# Altium PCB Power Board.PcbDoc
Units mil, origin at the board's own origin, x right, y up, seen from the top; angles counter-clockwise.
Board outline 6010 x 5000 mil, 4 copper layers (Top Layer, Power Plane, Ground Plane, Bottom Layer); 59 components, 37 nets, 179 pads, 26 vias.
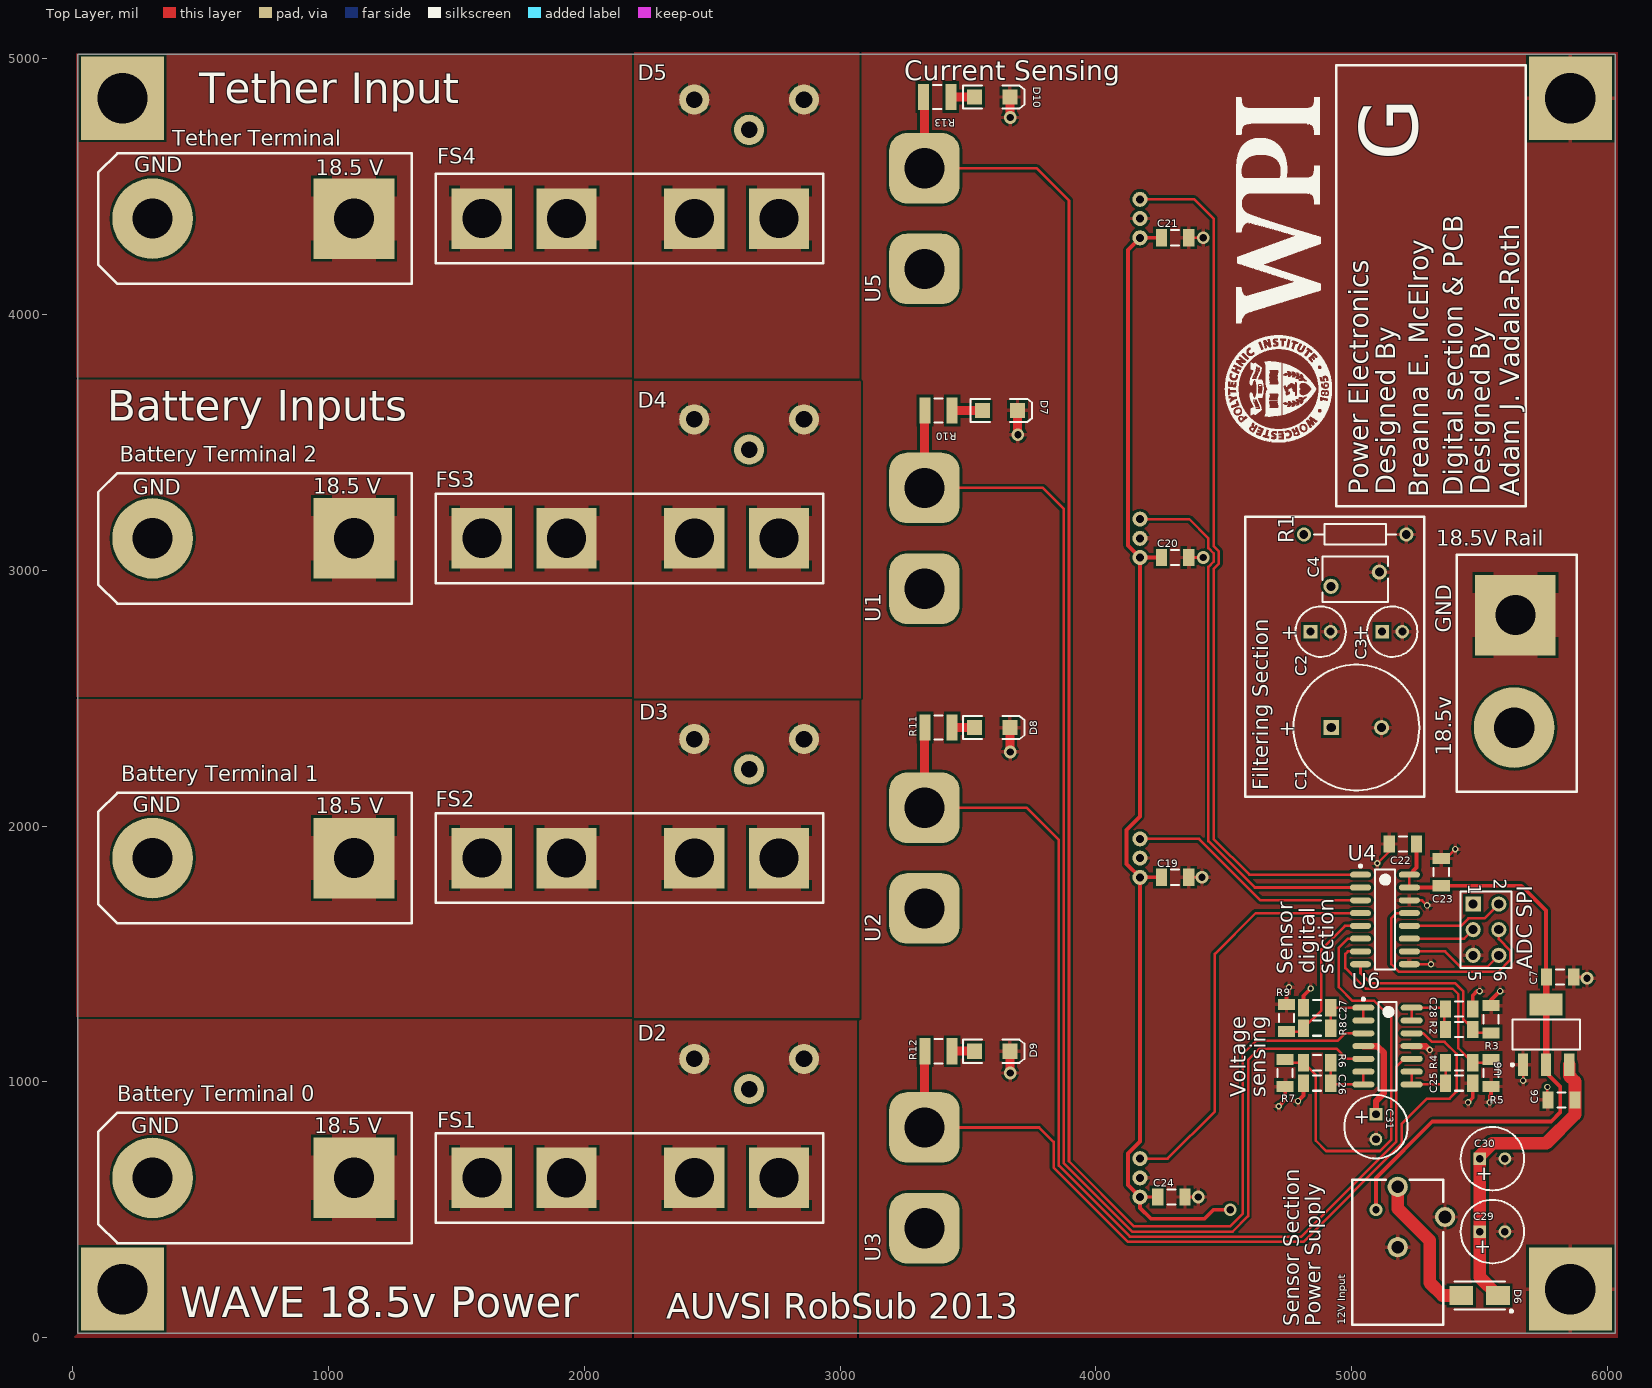
[diagram p0: Top Layer view]
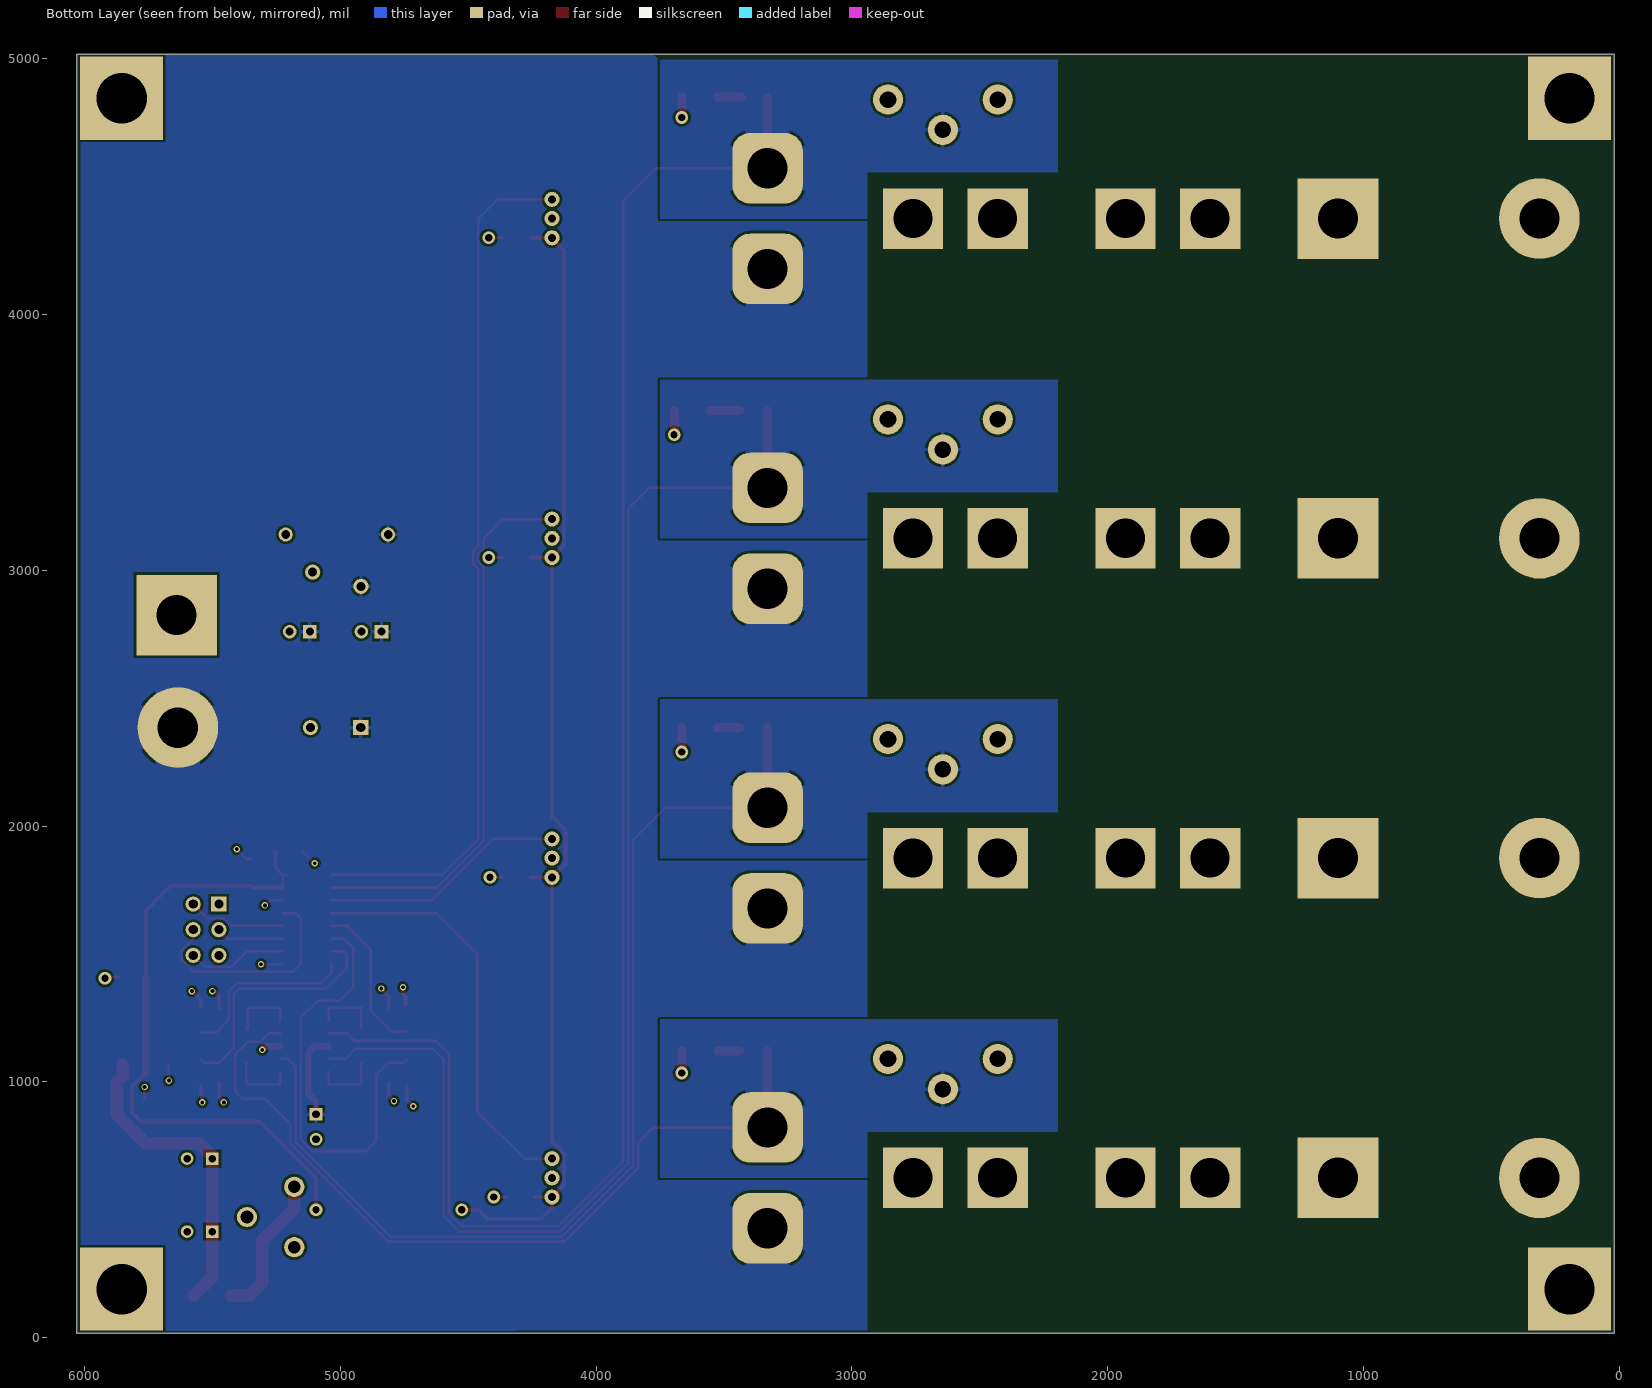
[diagram p1: Bottom Layer view, seen from below]
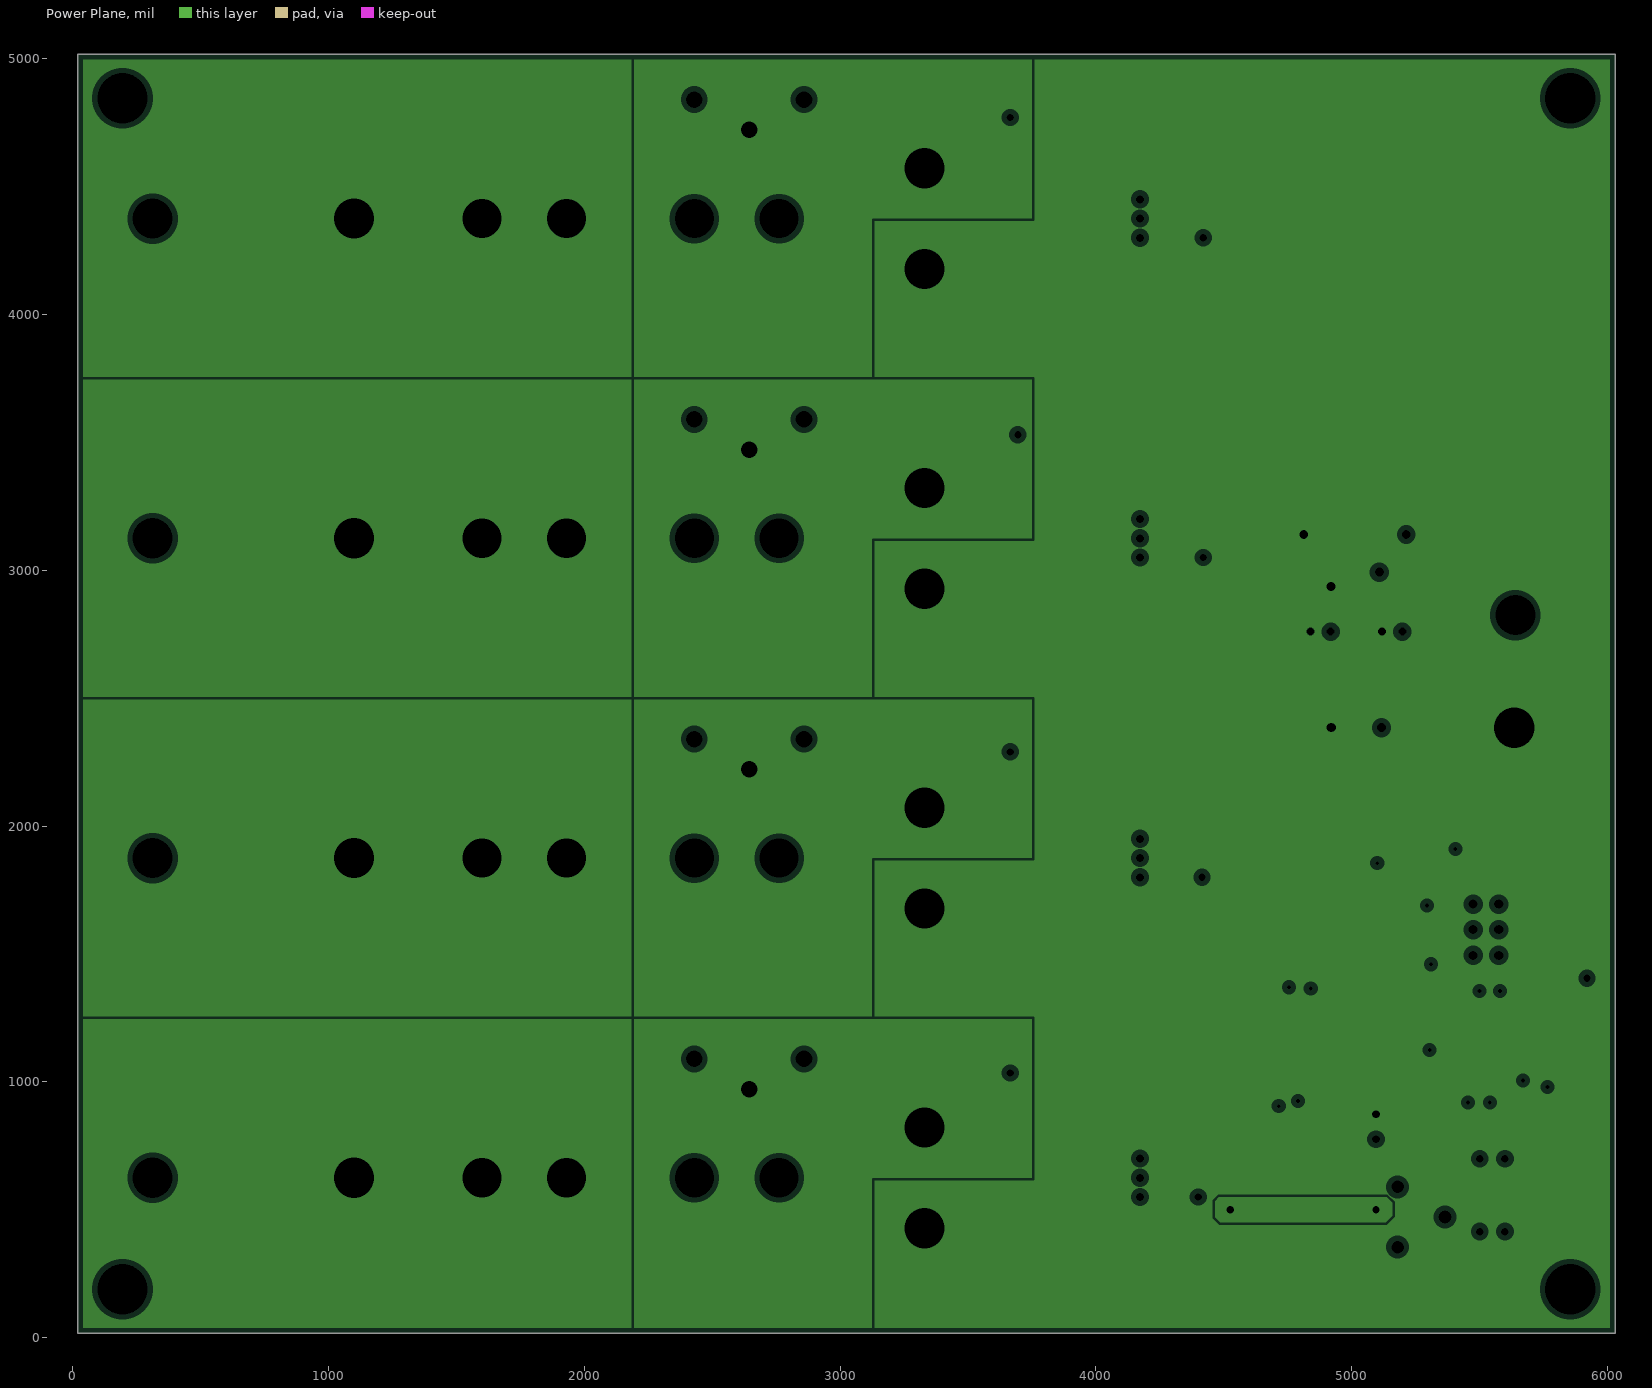
[diagram p2: Power Plane, clearances drawn from the general rule]
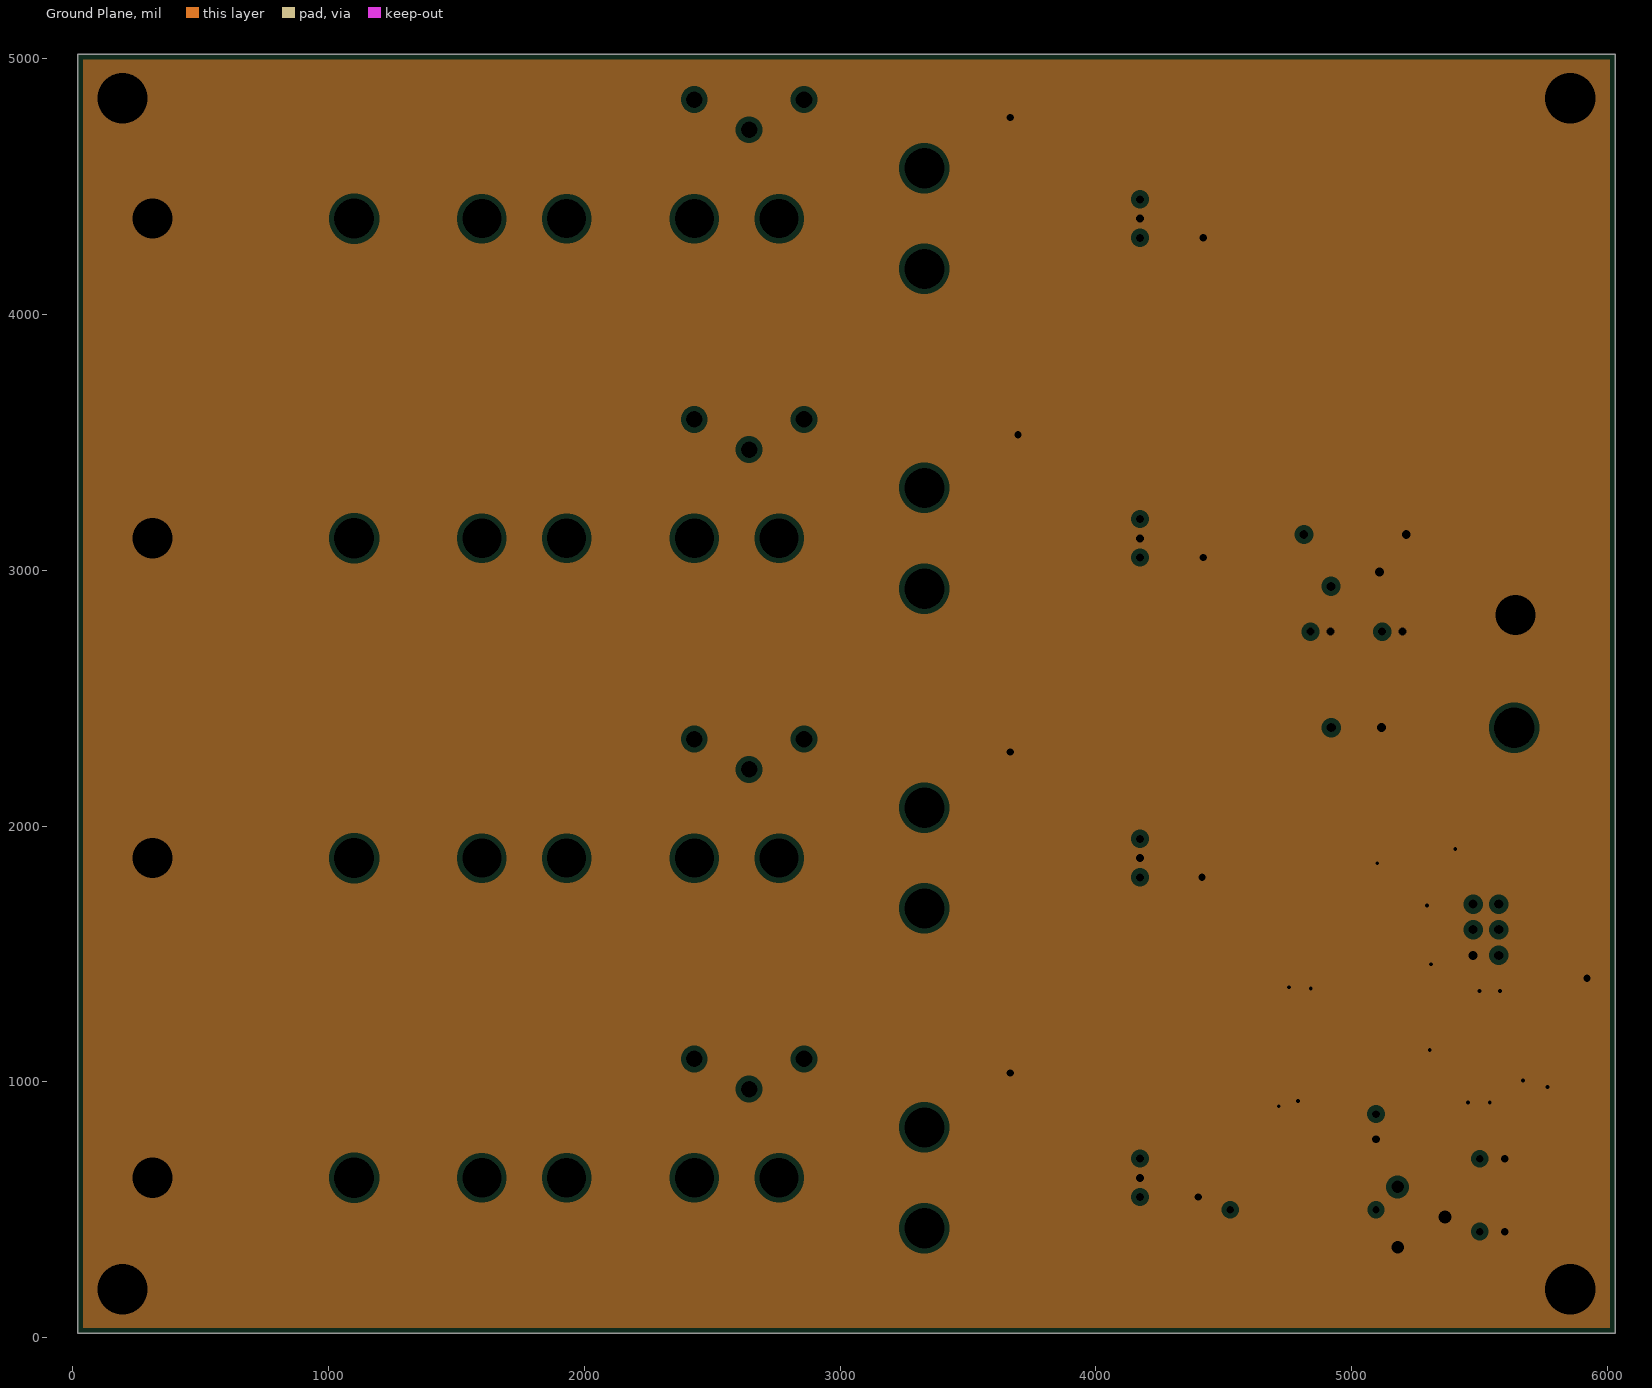
[diagram p3: Ground Plane, clearances drawn from the general rule]

## Layer stack, top to bottom
Top Layer: signal copper 1.4
Dielectric: core 12.6, FR-4, Dk 4.8
Power Plane: plane copper 1.4, net (Multiple Nets)
Dielectric: prepreg 12.6, FR-4, Dk 4.8
Ground Plane: plane copper 1.4, net GND
Dielectric: core 12.6, FR-4, Dk 4.8
Bottom Layer: signal copper 1.4

## Board outline
20,17.5 20,5017.5 6030,5017.5 6030,17.5

## Design rules (kind name [scope] priority, off if disabled: settings)
Clearance Clearance_1 [(InNet('18.5VCC') AND InComponent('U3'))] p1: gap=10
Clearance [All] p2: gap=10
Height [All] p1: minheight=0 maxheight=2000 prefheight=500
PlaneClearance [All] p1: clearance=20
PlaneConnect PlaneConnect_19 [(InNet('18.5VCC') AND InComponent('U1'))] p1: planeconnectstyle=Relief reliefexpansion=20 reliefentries=4 reliefconductorwidth=100 reliefairgap=25
PlaneConnect PlaneConnect_18 [(InNet('18.5VCC') AND InComponent('U3'))] p2: planeconnectstyle=Relief reliefexpansion=20 reliefentries=4 reliefconductorwidth=100 reliefairgap=25
PlaneConnect PlaneConnect_17 [(InNet('BAT_VOLT_SENSE0') AND InComponent('U3'))] p3: planeconnectstyle=Relief reliefexpansion=20 reliefentries=4 reliefconductorwidth=100 reliefairgap=25
PlaneConnect PlaneConnect_16 [(InNet('BAT_VOLT_SENSE0') AND InComponent('D2'))] p4: planeconnectstyle=Relief reliefexpansion=20 reliefentries=4 reliefconductorwidth=50 reliefairgap=25
PlaneConnect PlaneConnect_15 [(InNet('18.5VCC') AND InComponent('U2'))] p5: planeconnectstyle=Relief reliefexpansion=20 reliefentries=4 reliefconductorwidth=100 reliefairgap=25
PlaneConnect PlaneConnect_14 [(InNet('BAT_VOLT_SENSE1') AND InComponent('U2'))] p6: planeconnectstyle=Relief reliefexpansion=20 reliefentries=4 reliefconductorwidth=100 reliefairgap=25
PlaneConnect PlaneConnect_13 [(InNet('BAT_VOLT_SENSE1') AND InComponent('D3'))] p7: planeconnectstyle=Relief reliefexpansion=20 reliefentries=4 reliefconductorwidth=50 reliefairgap=25
PlaneConnect PlaneConnect_12 [(InNet('BAT_VOLT_SENSE2') AND InComponent('U1'))] p8: planeconnectstyle=Relief reliefexpansion=20 reliefentries=4 reliefconductorwidth=100 reliefairgap=25
PlaneConnect PlaneConnect_11 [(InNet('BAT_SENSE_2') AND InComponent('D4'))] p9: planeconnectstyle=Relief reliefexpansion=20 reliefentries=4 reliefconductorwidth=50 reliefairgap=25
PlaneConnect PlaneConnect_10 [(InNet('18.5VCC') AND InComponent('U5'))] p10: planeconnectstyle=Relief reliefexpansion=20 reliefentries=4 reliefconductorwidth=100 reliefairgap=25
PlaneConnect PlaneConnect_9 [(InNet('TETH_VOLT_SENSE') AND InComponent('U5'))] p11: planeconnectstyle=Relief reliefexpansion=20 reliefentries=4 reliefconductorwidth=100 reliefairgap=25
PlaneConnect PlaneConnect_5 [(InNet('TETH_VOLT_SENSE') AND InComponent('D5'))] p12: planeconnectstyle=Relief reliefexpansion=20 reliefentries=4 reliefconductorwidth=50 reliefairgap=25
PlaneConnect PlaneConnect_8 [(InNet('NetD5_1') OR InNet('NetD4_1') OR InNet('NetD3_1') OR InNet('NetD2_1'))] p13: planeconnectstyle=Relief reliefexpansion=20 reliefentries=4 reliefconductorwidth=35 reliefairgap=35
PlaneConnect PlaneConnect_7 [(InNet('GND') AND InComponent('18.5V Rail'))] p14: planeconnectstyle=Relief reliefexpansion=20 reliefentries=4 reliefconductorwidth=175 reliefairgap=35
PlaneConnect PlaneConnect_6 [(InNet('18.5VCC') AND InComponent('18.5V Rail'))] p15: planeconnectstyle=Relief reliefexpansion=20 reliefentries=4 reliefconductorwidth=175 reliefairgap=35
PlaneConnect PlaneConnect_4 [(InNet('NetBattery Terminal 0_1'))] p16: planeconnectstyle=Relief reliefexpansion=20 reliefentries=4 reliefconductorwidth=175 reliefairgap=35
PlaneConnect PlaneConnect_3 [(InNet('NetBattery Terminal 1_1'))] p17: planeconnectstyle=Relief reliefexpansion=20 reliefentries=4 reliefconductorwidth=175 reliefairgap=35
PlaneConnect PlaneConnect_2 [(InNet('NetBattery Terminal 2_1'))] p18: planeconnectstyle=Relief reliefexpansion=20 reliefentries=4 reliefconductorwidth=175 reliefairgap=35
PlaneConnect PlaneConnect_1 [InNet('NetFS4_1')] p19: planeconnectstyle=Relief reliefexpansion=20 reliefentries=4 reliefconductorwidth=175 reliefairgap=35
PlaneConnect [All] p20: planeconnectstyle=Relief reliefexpansion=10 reliefentries=4 reliefconductorwidth=15 reliefairgap=10
PolygonConnect PolygonConnect_24 [(InNet('NetD5_1') AND InComponent('FS4'))] p1: connectstyle=Relief reliefconductorwidth=175 reliefentries=4 polygonreliefangle="90 Angle"
PolygonConnect PolygonConnect_23 [(InNet('NetD4_1') AND InComponent('FS3'))] p2: connectstyle=Relief reliefconductorwidth=175 reliefentries=4 polygonreliefangle="90 Angle"
PolygonConnect PolygonConnect_22 [(InNet('NetD3_1') AND InComponent('FS2'))] p3: connectstyle=Relief reliefconductorwidth=175 reliefentries=4 polygonreliefangle="90 Angle"
PolygonConnect PolygonConnect_21 [(InNet('NetD2_1') AND InComponent('FS1'))] p4: connectstyle=Relief reliefconductorwidth=175 reliefentries=4 polygonreliefangle="90 Angle"
PolygonConnect PolygonConnect_20 [(InNet('18.5VCC') AND InComponent('U5'))] p5: connectstyle=Relief reliefconductorwidth=175 reliefentries=4 polygonreliefangle="90 Angle"
PolygonConnect PolygonConnect_19 [(InNet('18.5VCC') AND InComponent('U3'))] p6: connectstyle=Relief reliefconductorwidth=175 reliefentries=4 polygonreliefangle="90 Angle"
PolygonConnect PolygonConnect_18 [(InNet('18.5VCC') AND InComponent('U2'))] p7: connectstyle=Relief reliefconductorwidth=175 reliefentries=4 polygonreliefangle="90 Angle"
PolygonConnect PolygonConnect_17 [(InNet('18.5VCC') AND InComponent('U1'))] p8: connectstyle=Relief reliefconductorwidth=175 reliefentries=4 polygonreliefangle="90 Angle"
PolygonConnect PolygonConnect_9 [(InNet('NetFS4_1') AND InComponent('FS4'))] p9: connectstyle=Relief reliefconductorwidth=175 reliefentries=4 polygonreliefangle="90 Angle"
PolygonConnect PolygonConnect_16 [(InNet('TETH_VOLT_SENSE') AND InComponent('U5'))] p10: connectstyle=Relief reliefconductorwidth=175 reliefentries=4 polygonreliefangle="90 Angle"
PolygonConnect PolygonConnect_15 [(InNet('BAT_VOLT_SENSE2') AND InComponent('U1'))] p11: connectstyle=Relief reliefconductorwidth=175 reliefentries=4 polygonreliefangle="90 Angle"
PolygonConnect PolygonConnect_14 [(InNet('BAT_VOLT_SENSE1') AND InComponent('U2'))] p12: connectstyle=Relief reliefconductorwidth=175 reliefentries=4 polygonreliefangle="90 Angle"
PolygonConnect PolygonConnect_13 [(InNet('BAT_VOLT_SENSE0') AND InComponent('U3'))] p13: connectstyle=Relief reliefconductorwidth=175 reliefentries=4 polygonreliefangle="90 Angle"
PolygonConnect PolygonConnect_12 [(InNet('NetD5_1') OR InNet('NetD4_1') OR InNet('NetD3_1') OR InNet('NetD2_1'))] p14: connectstyle=Relief reliefconductorwidth=50 reliefentries=4 polygonreliefangle="90 Angle"
PolygonConnect PolygonConnect_11 [(InNet('GND') AND InComponent('18.5V Rail'))] p15: connectstyle=Relief reliefconductorwidth=175 reliefentries=4 polygonreliefangle="90 Angle"
PolygonConnect PolygonConnect_10 [(InNet('18.5VCC') AND InComponent('18.5V Rail'))] p16: connectstyle=Relief reliefconductorwidth=175 reliefentries=4 polygonreliefangle="90 Angle"
PolygonConnect PolygonConnect_8 [(InNet('NetFS4_1') AND InComponent('Tether Terminal'))] p17: connectstyle=Relief reliefconductorwidth=175 reliefentries=4 polygonreliefangle="90 Angle"
PolygonConnect PolygonConnect_7 [(InNet('NetBattery Terminal 2_1') AND InComponent('FS3'))] p18: connectstyle=Relief reliefconductorwidth=175 reliefentries=4 polygonreliefangle="90 Angle"
PolygonConnect PolygonConnect_6 [(InNet('NetBattery Terminal 2_1') AND InComponent('Battery Terminal 2'))] p19: connectstyle=Relief reliefconductorwidth=175 reliefentries=4 polygonreliefangle="90 Angle"
PolygonConnect PolygonConnect_5 [(InNet('NetBattery Terminal 2_1') AND InComponent('FS3'))] p20: connectstyle=Relief reliefconductorwidth=175 reliefentries=4 polygonreliefangle="90 Angle"
PolygonConnect PolygonConnect_4 [(InNet('NetBattery Terminal 1_1') AND InComponent('FS2'))] p21: connectstyle=Relief reliefconductorwidth=175 reliefentries=4 polygonreliefangle="90 Angle"
PolygonConnect PolygonConnect_3 [(InNet('NetBattery Terminal 1_1') AND InComponent('Battery Terminal 1'))] p22: connectstyle=Relief reliefconductorwidth=175 reliefentries=4 polygonreliefangle="90 Angle"
PolygonConnect PolygonConnect_2 [(InNet('NetBattery Terminal 0_1') AND InComponent('FS1'))] p23: connectstyle=Relief reliefconductorwidth=175 reliefentries=4 polygonreliefangle="90 Angle"
PolygonConnect PolygonConnect_1 [(InNet('NetBattery Terminal 0_1') AND InComponent('Battery Terminal 0'))] p24: connectstyle=Relief reliefconductorwidth=175 reliefentries=4 polygonreliefangle="90 Angle"
PolygonConnect [All] p25: connectstyle=Relief reliefconductorwidth=15 reliefentries=4 polygonreliefangle="90 Angle"
RoutingVias [All] p1: holewidth=28 width=50 viastyle="Through Hole" minholewidth=28 minwidth=50 maxholewidth=28 maxwidth=50
SilkscreenOverComponentPads [All] p1: minsilkscreentomaskgap=10
SolderMaskExpansion [All] p1: expansion=4
Width [All] p1: maxlimit=500 minlimit=6 preferedwidth=50
24 further rules are at their usual default settings.

## Components (designator, comment, footprint, x,y, rotation, side; value= is the part's Value field where it differs from the comment)
"12V Input" "Center-positive 2.1 mm power jack" PJ-102AH 5180,590 r180 top
"18.5V Rail" "18.5 Power Rail" "Power Rail Pad" 5635,2385 r90 top
"ADC SPI" "Header 3X2" HDR2X3 5475,1695 r270 top
"Battery Terminal 0" "Battery Terminal" "Battery Terminal" 1100,625 r180 top
"Battery Terminal 1" "Battery Terminal" "Battery Terminal" 1100,1875 r180 top
"Battery Terminal 2" "Battery Terminal" "Battery Terminal" 1100,3125 r180 top
C1 "" CAPPR5-12.5x40 5018.43,2385 r0 top
C2 "" CAPPR2-5x11 4878.43,2760 r0 top
C3 "" CAPPR2-5x11 5158.43,2760 r0 top
C4 "" CAPRD5-6.5x4.5 5013.43,2965 r0 top
C6 "Cap Semi" C1206 5820,930 r0 top
C7 "Cap Semi" C1206 5815,1410 r180 top
C19 "Cap Semi" C1206 4310,1800 r0 top
C20 "Cap Semi" C1206 4310,3050 r0 top
C21 "Cap Semi" C1206 4310,4300 r0 top
C22 "Cap Semi" C1206 5200,1930 r180 top
C23 "Cap Semi" C1206 5350,1820 r90 top
C24 "Cap Semi" C1206 4295,550 r0 top
C25 "Cap Semi" C1206 5420,995 r180 top
C26 "Cap Semi" C1206 4865,995 r0 top
C27 "Cap Semi" C1206 4865,1290 r0 top
C28 "Cap Semi" C1206 5420,1285 r180 top
C29 "Cap Pol1" CAPPR2.5-6.3x5 5550,415 r0 top
C30 "Cap Pol1" CAPPR2.5-6.3x5 5550,700 r0 top
C31 "Cap Pol1" CAPPR2.5-6.3x5 5095,825 r270 top
D2 "MBR6045WT" MBR6045WT 2430,1090 r0 top
D3 "MBR6045WT" MBR6045WT 2430,2340 r0 top
D4 "MBR6045WT" MBR6045WT 2430,3590 r0 top
D5 "MBR6045WT" MBR6045WT 2430,4840 r0 top
D6 "PMEG4050EP" "NXP Schottkey reverse" 5490,160 r270 top
D7 "LED2" 3.2X1.6X1.1 3625,3625 r0 top
D8 "LED2" 3.2X1.6X1.1 3595,2385 r0 top
D9 "LED2" 3.2X1.6X1.1 3595,1120 r0 top
D10 "LED2" 3.2X1.6X1.1 3595,4850 r0 top
FS1 "M60 Automotive Fuse Socket" M60 1600,625 r0 top
FS2 "M60 Automotive Fuse Socket" M60 1600,1875 r0 top
FS3 "M60 Automotive Fuse Socket" M60 1600,3125 r0 top
FS4 "M60 Automotive Fuse Socket" M60 1600,4375 r0 top
R1 "Res2" AXIAL-0.4 5013.43,3140 r180 top
R2 "Res3" RESC3216L 5420,1205 r180 top
R3 "Res3" RESC3216L 5545,1245 r90 top
R4 "Res3" RESC3216L 5420,1075 r180 top
R5 "Res3" RESC3216L 5545,1035 r270 top
R6 "Res3" RESC3216L 4865,1075 r0 top
R7 "Res3" RESC3216L 4740,1035 r270 top
R8 "Res3" RESC3216L 4865,1210 r0 top
R9 "Res3" RESC3216L 4745,1250 r90 top
R10 "Res3" 14-1210 3385,3625 r180 top
R11 "Res3" 14-1210 3385,2385 r180 top
R12 "Res3" 14-1210 3385,1120 r180 top
R13 "Res3" 14-1210 3380,4850 r180 top
"Tether Terminal" "Battery Terminal" "Battery Terminal" 1100,4375 r180 top
U1 "ACS759ECB" "ACS759ECB Round Holes" 3330,3125 r90 top
U2 "ACS759ECB" "ACS759ECB Round Holes" 3330,1875 r90 top
U3 "ACS759ECB" "ACS759ECB Round Holes" 3330,625 r90 top
U4 "MCP3208" "MCP3208 - duplicate" 5130,1635 r0 top
U5 "ACS759ECB" "ACS759ECB Round Holes" 3330,4375 r90 top
U6 "NX1117CE33Z" NX1117CE33Z 5760,1185 r90 top
U6 "LM324DR" "LM324DR - duplicate" 5140,1140 r0 top (schematic designator U5)

## Footprints (in the part's own frame and the unit in brackets; to place one, negate y for a bottom-side part, rotate by r counter-clockwise, add the part's x,y. Pads: shape width x height; smd on the part's side, far side on the other; paste and mask are expansions set on the pad)
3.2X1.6X1.1 [mm] "SMT LED; 2 Flat Leads"
  rect 1.5x1.5 smd: 1(-1.75,0) 2(1.75,0)
  silkscreen extent -2.9,-1.15 3.2,1.15
14-1210 [mm] "Chip Resistor, Body 3.2x2.5mm, IPC High Density"
  rect 1.1x2.6 smd: 1(-1.35,0) 2(1.35,0)
  silkscreen extent -0.4,-1.2 0.4,1.2, body extent -1.68,-1.32 1.68,1.32, height 0.9
"ACS759ECB Round Holes" [mm] "Current Sensor"
  round 1.5 hole 0.8: 1(-1.91,-21.4) 2(0,-21.4) 3(1.91,-21.4)
  rrect50% 7x7 hole 4: 4(5,0) 5(-5,0)
AXIAL-0.4 [mm] "Axial Device, Thru-Hole; 2 Leads; 0.4 in Pin Spacing"
  round 1.4 hole 0.85: 1(-5.08,0) 2(5.08,0)
  silkscreen extent -4.06,-1.02 4.06,1.02
"Battery Terminal" [mm] "Custom batery Terminal"
  rect 8x8 hole 4: 1(0,0)
  round 8 hole 4: 2(20,0)
  silkscreen extent -5.72,-6.48 25.4,6.48
C1206 [mm] "Chip Capacitor, Body 3.2x1.6mm, IPC High Density"
  rect 1.1x1.7 smd: 1(-1.35,0) 2(1.35,0)
  silkscreen extent -0.4,-0.75 0.4,0.75, body extent -1.7,-0.9 1.7,0.9, height 1.3
CAPPR2-5x11 [mm] "Capacitor, Electrolytic, Radial; Body 5 x 11 mm (Dia.xH typ); Pin Spacing 2 mm (typ)"
  rect 1.35x1.35 hole 0.8: 1(-1,0)
  round 1.35 hole 0.8: 2(1,0)
  silkscreen extent -2.5,-2.5 2.5,2.5
CAPPR2.5-6.3x5 [mm] "Capacitor, Electrolytic, Radial; Body 6.3 x 5 mm (Dia.xH typ); Pin Spacing 2.5 mm (typ)"
  rect 1.25x1.25 hole 0.75: 1(-1.25,0)
  round 1.25 hole 0.75: 2(1.25,0)
  silkscreen extent -3.15,-3.15 3.15,3.15
CAPPR5-12.5x40 [mm] "Capacitor, Electrolytic, Radial; Body 12.5 x 40 mm (Dia.xH typ); Pin Spacing 5 mm (typ)"
  rect 1.5x1.5 hole 0.9: 1(-2.5,0)
  round 1.5 hole 0.9: 2(2.5,0)
  silkscreen extent -6.25,-6.25 6.25,6.25
CAPRD5-6.5x4.5 [mm] "Capacitor, Ceramic, Thru-Hole, Disc; Body 6.5 x 4.5 mm (LxW max) Pin Spacing 5 mm (typ)"
  round 1.5 hole 0.9: 1(-2.4,-0.7) 2(2.4,0.7)
  silkscreen extent -3.25,-2.25 3.25,2.25
HDR2X3 [mm] "Connector; Header; 3x2 Position"
  rect 1.5x1.5 hole 0.9: 1(0,0)
  round 1.5 hole 0.9: 2(0,2.54) 3(2.54,0) 4(2.54,2.54) 5(5.08,0) 6(5.08,2.54)
  silkscreen extent -1.27,-1.27 6.35,3.81
"LM324DR - duplicate" [mm] "LM324DR OPAMP"
  oval 2.2x0.6 smd: 1(-2.4,3.81) 2(-2.4,2.54) 3(-2.4,1.27) 4(-2.4,0) 5(-2.4,-1.27) 6(-2.4,-2.54) 7(-2.4,-3.81) 8(2.4,-3.81) 9(2.4,-2.54) 10(2.4,-1.27) 11(2.4,0) 12(2.4,1.27) 13(2.4,2.54) 14(2.4,3.81)
  silkscreen extent -2.52,-4.4 0.9,4.78, body extent -2,-4.38 2,4.38, height 1.75
M60 [mm] "Automotive fuse carrier"
  rect 6x6 hole 3.9: 1(0,0) 2(8.4,0) 3(21.1,0) 4(29.5,0)
  silkscreen extent -4.57,-4.44 33.91,4.44
MBR6045WT [mm] "Rectifier Diode"
  round 3 hole 1.65: 1(0,0) 2(5.45,-3) 3(10.9,0)
"MCP3208 - duplicate" [mm] "MCP3208 8 Channel ADC"
  oval 2.1x0.6 smd: 1(-2.425,4.445) 2(-2.425,3.175) 3(-2.425,1.905) 4(-2.425,0.635) 5(-2.425,-0.635) 6(-2.425,-1.905) 7(-2.425,-3.175) 8(-2.425,-4.445) 9(2.425,-4.445) 10(2.425,-3.175) 11(2.425,-1.905) 12(2.425,-0.635) 13(2.425,0.635) 14(2.425,1.905) 15(2.425,3.175) 16(2.425,4.445)
  silkscreen extent -2.55,-4.95 0.98,5.42, body extent -1.95,-4.95 1.95,4.95, height 1.25
NX1117CE33Z [mm] "3.3v linear regulator"
  rect 2.2x1 smd: 1(-3,2.3) 2(-3,0) 3(-3,-2.3)
  rect 2.2x3.3 smd: 4(3,0)
  silkscreen extent -3.12,-3.35 1.5,3.47, body extent -1.85,-3.35 1.85,3.35, height 1.8
"NXP Schottkey reverse" [mm]
  rect 1.85x2.35 smd: 1(-0.127,-1.571) 2(-0.127,2.079)
  silkscreen extent -1.53,-2.25 1.55,3.53, body extent -1.48,-2.25 1.22,2.75, height 1.1
PJ-102AH [mm] "Center positive 2.1 mm power jack"
  round 2 hole 1.27: 1(0,0) 2(0,6) 3(-4.7,3)
  silkscreen extent -4.5,-0.7 4.5,13.7, body extent -5.8,-0.7 4.5,13.7, height 11
"Power Rail Pad" [mm] "Custom pad for WAVE power rails"
  round 8 hole 4: 1(0,0)
  rect 8x8 hole 4: 2(11.176,-0.127)
  silkscreen extent -6.35,-6.22 17.14,5.72
RESC3216L [mm] "Chip Resistor, Body 3.2x1.6mm, IPC High Density"
  rect 1.1x1.7 smd: 1(-1.35,0) 2(1.35,0)
  silkscreen extent -0.4,-0.75 0.4,0.75, body extent -1.68,-0.87 1.68,0.87, height 0.71

## Part data
"12V Input": library part PWR2.5, "Power jack"
"ADC SPI": "Header, 3-Pin, Dual row"
C1 C2 C3 C4: library part Cap, "Capacitor"
C6 C7 C19 C20 C21 C22 C23 C24 C25 C26 C27 C28: "Capacitor (Semiconductor SIM Model)"
C29 C30 C31: "Polarized Capacitor (Radial)"
D6: library part Diode, "Default Diode"
D7 D8 D9 D10: "Typical RED, GREEN, YELLOW, AMBER GaAs LED"
FS1 FS2 FS3 FS4: library part "M60 Automotive Fuse", "Automotive Fuse Socket"
R1 R2 R3 R4 R5 R6 R7 R8 R9 R10 R11 R12 R13: "Resistor"
U6: "3.3v Linear Regulator"

## Free pads (board coordinates)
  rect 325x325 hole 196.85: ""(195,190) ""(195,4845) ""(5855,190) ""(5855,4845)

## Via types
v1: diameter 25, hole 15, Top Layer to Bottom Layer, 15 vias
v2: diameter 50, hole 28, Top Layer to Bottom Layer, 11 vias

## Nets (pads, with @x,y where several pads share a name; then routed paths per layer and width w, separated by ;. In a path a pad name is that pad's centre, name@x,y a point inside that pad or via, vN(x,y) a via of type N, cw(c..) or ccw(c..) an arc to the next point about the centre after c; other vN are vias at no path point)
12VCC: "12V Input.1" D6.1 | length 570.6
  Top Layer w50: 5180,590 5180,505 5305,380 5305,215 5355,165 D6.1
18.5VCC: "18.5V Rail.1" C1.1 C2.1 C3.1 C4.1 C31.1 R1.2 U1.5 U2.5 U3.5 U5.5 U6.4@5045.51,1140 | length 343.1
  Top Layer w25: U6.4@5045.51,1140 5100,1140 5125,1115 5125,955 5095,925 C31.1
BAT_SENSE_1: U1.3 U4.2 | length 2168.3
  Top Layer w10: U1.3 4172.72,3200 4365,3200 4440,3125 4440,3086.57 4460,3066.57 4460,3033.43 4440,3013.43 4440,1941.72 4621.72,1760 U4.2
BAT_SENSE_2: U2.3 U4.3 | length 961.5
  Top Layer w10: U2.3 4403.23,1950.2 4643.43,1710 U4.3
BAT_SENSE_3: U3.3 U4.4 | length 1620
  Top Layer w10: U3.3 4172.72,700 4280,700 4465,885 4465,1500 4625,1660 U4.4
BAT_VOLT_SENSE0: D2.2 R12.2 U3.4 U6.12 | length 3266.6
  Top Layer w10: U3.4 3778.15,821.85 3835,765 3835,665 4125,375 4811.57,375 5195,758.43 5195,835 5295,935 5383.18,935 5410,961.82 5410,1110 5363.46,1156.54 5313.46,1156.54 5280,1190 U6.12
  Top Layer w35: U3.4 R12.2@3330,1120
BAT_VOLT_SENSE1: D3.2 R11.2 U2.4 U6.10 | length 4117.6
  Top Layer w10: U2.4 3728.15,2071.85 3855,1945 3855,673.28 4133.28,395 4803.28,395 5175,766.72 5175,1060 5205,1090 U6.10 ; R11.2@3330,2383.15 R11.2
  Top Layer w35: U2.4 R11.2@3330,2383.15
BAT_VOLT_SENSE2: D4.2 R10.2 U1.4 U6.5 | length 5392.2
  Top Layer w10: U1.4 3793.15,3321.85 3875,3240 3875,681.57 4141.57,415 4535,415 4595,475 4595,1085 4640,1130 4940,1130 4980,1090 U6.5 ; R10.2@3330,3623.15 R10.2
  Top Layer w35: U1.4 R10.2@3330,3623.15
BATVADC0: R4.1 R5.1 U4.7 | length 971.5
  Top Layer w10: U4.7 4985,1510 4975,1500 4975,1445 5055,1365 5395,1365 5416.5,1343.5 5416.5,1131.79 5473.15,1075.13 R4.1 5531.85,1075 R5.1
BATVADC1: R6.1 R7.1 U4.6 | length 1716.1
  Top Layer w10: R7.1 4753.15,1075 R6.1 4860,1026.85 4860,770 4900,730 5110,730 5155,775 5155,1249.92 5088.11,1316.81 5003.19,1316.81 4950,1370 4950,1525 4985,1560 U4.6
BATVADC2: R8.1 R9.1 U4.5 | length 600.4
  Top Layer w10: R9.1 4798.7,1196.85 R8.1 4881.5,1279.65 4881.5,1518.21 4973.28,1610 U4.5
CS: "ADC SPI.6" U4.10 | length 393
  Top Layer w10: U4.10 5365,1510 5425,1450 5530,1450 5575,1495
GND: "12V Input.2" "12V Input.3" "18.5V Rail.2" "ADC SPI.5" "Battery Terminal 0.2" "Battery Terminal 1.2" "Battery Terminal 2.2" "Tether Terminal.2" C1.2 C2.2 C3.2 C4.2 C6.1 C7.1 C19.2 C20.2 C21.2 C22.2 C23.2 C24.2 C25.1 C26.1 C27.1 C28.1 C29.2 C30.2 C31.2 D7.2 D8.2 D9.2 D10.2 pad. R1.1 R3.2 R5.2 R7.2 R9.2 U1.2 U2.2 U3.2 U4.9 U4.14 U5.2 U6.1@5669.45,1066.89 U6.11 | length 1739.4
  Top Layer w10: v2@3663.9,2291.1 v2(3665,2290) ; v2@3663.9,4771.1 v2(3665,4770) ; v2@3693.9,3531.1 v2(3695,3530) ; C24.2 v2(4400,550) ; C19.2 v2(4415,1800) ; C20.2 v2(4420,3050) ; C21.2 v2(4420,4300) ; v1(5100,1855) 5101.85,1855 C22.2@5146.85,1900 ; U4.9 v1(5310,1460) ; U4.14 5275,1710 v1(5295,1690) ; C23.2 5368.15,1873.15 v1(5405,1910) ; v1@5490,1355 v1(5500,1355) ; U6.1@5669.45,1066.89 5670,1066.34 v1(5670,1005) ; v1(5765,980) 5765,931.85 C6.1 ; C7.1 5915,1410 v2(5920,1405)
  Top Layer w15: v1@4717.5,907.5 4740,930 R7.2 ; R9.2 4745,1335 4755,1345 v1(4755,1370) ; v1(4790,925) 4811.85,946.85 C26.1 ; C27.1 4811.85,1336.85 v1(4840,1365) ; v1(5455,920) 5473.15,938.15 C25.1 ; C28.1 5473.15,1338.15 v1@5490,1355 ; v1(5540,920) 5540,945 5545,950 R5.2 ; R3.2 5545,1320 v1(5580,1355)
  Top Layer w25: U6.11 5290,1140 v1(5305,1125)
  Top Layer w35: v2@3663.9,1036.1 D9.2 ; v2@3663.9,2291.1 D8.2 ; v2@3663.9,4771.1 D10.2 ; v2@3693.9,3531.1 D7.2
  other v1: 4715,905
  other v2: 3665,1035
MISO: "ADC SPI.2" U4.12 | length 384.7
  Top Layer w10: U4.12 5427.03,1610 5456.56,1639.53 5519.53,1639.53 5575,1695
MOSI: "ADC SPI.3" U4.11 | length 264
  Top Layer w10: U4.11 5440,1560 5475,1595
"NetBattery Terminal 0_1": "Battery Terminal 0.1" FS1.1 FS1.2
"NetBattery Terminal 1_1": "Battery Terminal 1.1" FS2.1 FS2.2
"NetBattery Terminal 2_1": "Battery Terminal 2.1" FS3.1 FS3.2
NetC6_2: C6.2 C29.1 C30.1 D6.2 U6.3@5850.55,1066.89 | length 1218.4
  Top Layer w50: D6.2 5500.79,236.06 C29.1 C30.1 5500.79,710.79 5550,760 5760.79,760 5873.15,872.36 C6.2 5873.15,1001.85 5850.55,1024.45 U6.3@5850.55,1066.89
NetC25_2: C25.2 R4.2 U6.8 U6.9 | length 264.4
  Top Layer w10: U6.9 U6.8 5361.85,990 C25.2 R4.2
NetC26_2: C26.2 R6.2 U6.6 U6.7 | length 259.4
  Top Layer w10: R6.2 C26.2 4923.15,990 U6.7 U6.6
NetC27_2: C27.2 R8.2 U6.1@5045.51,1290 U6.2@5045.51,1240 | length 257.4
  Top Layer w10: R8.2 C27.2 5045.51,1290 U6.2@5045.51,1240
NetC28_2: C28.2 R2.2 U6.13 U6.14 | length 264.4
  Top Layer w10: U6.13 U6.14 5361.85,1290 5361.85,1210 R2.2
NetD2_1: D2.1 D2.3 FS1.3 FS1.4
NetD3_1: D3.1 D3.3 FS2.3 FS2.4
NetD4_1: D4.1 D4.3 FS3.3 FS3.4
NetD5_1: D5.1 D5.3 FS4.3 FS4.4
NetD7_1: D7.1 R10.1 | length 118
  Top Layer w35: R10.1 D7.1
NetD8_1: D8.1 R11.1 | length 88
  Top Layer w35: R11.1 D8.1
NetD9_1: D9.1 R12.1 | length 88
  Top Layer w35: R12.1 D9.1
NetD10_1: D10.1 R13.1 | length 93
  Top Layer w35: R13.1 D10.1
NetFS4_1: "Tether Terminal.1" FS4.1 FS4.2
SCK: "ADC SPI.4" U4.13 | length 891.9
  Top Layer w10: U4.13 5175,1660 5155,1640 5155,1460 5185,1430 5572.97,1430 5619.53,1476.56 5619.53,1513.44 5575,1557.97 5575,1595
TETH_VOLT_SENSE: D5.2 R13.2 U5.4 U6.3@5045.51,1190 | length 6587.1
  Top Layer w10: R13.2 R13.2@3330,4846.85 ; U5.4 3768.15,4571.85 3895,4445 3895,689.85 4149.85,435 4525,435 4575,485 4575,1110 4625.2,1160.2 4944.68,1160.2 4974.48,1190 U6.3@5045.51,1190
  Top Layer w35: U5.4 R13.2@3330,4846.85
TETHER_SENSE: U4.1 U5.3 | length 3392.7
  Top Layer w10: U5.3 4172.72,4450 4385,4450 4460,4375 4460,3094.85 4480,3074.85 4480,3025.15 4460,3005.15 4460,1950 4600,1810 U4.1
TETHVADC: R2.1 R3.1 U4.8 | length 707.3
  Top Layer w10: U4.8 5034.53,1425.47 5075,1385 5405,1385 5436.5,1353.5 5436.5,1243.32 5473.15,1206.67 R2.1 5486.3,1191.85 R3.1
VCC_3.3: C7.2 C19.1 C20.1 C21.1 C22.1 C23.1 C24.1 U1.1 U2.1 U3.1 U4.15 U4.16 U5.1 U6.2@5760,1066.89 U6.4@5760,1303.11 | length 7129.2
  Top Layer w10: U3.1@4172.72,550 C24.1 ; U4.16@5210,1810 U4.16 U4.15 ; C23.1@5343.15,1760 C23.1
  Top Layer w15: U3.1@4172.72,550 U3.1 ; C19.1 4172.72,1800 U2.1 ; C20.1 4172.72,3050 U1.1 ; C21.1 4172.72,4300 U5.1 4125,4252.28 4125,3097.32 U1.1 ; v2(4525,500) 4460,500 4425,465 4215,465 4172.52,507.48 U3.1 ; v2(5095,500) 5095,625 5315,845 5780,845 5815,880 5815,981.89 U6.2@5760,1036.89 ; U4.15 C23.1@5343.15,1760 ; U4.16 5253.15,1837.68 C22.1@5253.15,1900 ; C23.1 5663.15,1766.85 5760,1670 C7.2@5760,1410 ; U3.1 4125.49,596.83 4125.49,719.68 4172.52,766.7 U2.1 ; U2.1 4120,1852.32 4120,1985 4172.52,2037.52 U1.1
  Top Layer w25: U6.2@5760,1036.89 C7.2@5760,1410
pads on no net: "ADC SPI.1"

## Polygon pours and split planes (outlines as drawn)
NetFS4_1 on Top Layer "Power Plane-No Net" (solid, pour order 27): 15,3755 2185,3755 2185,5020 15,5020
"NetBattery Terminal 2_1" on Top Layer "Power Plane-No Net" (solid, pour order 26): 15,2505 2185,2505 2185,3745 15,3745
"NetBattery Terminal 1_1" on Top Layer "Power Plane-No Net" (solid, pour order 25): 15,1255 2185,1255 2185,2495 1908.93,2495 15,2495
"NetBattery Terminal 0_1" on Top Layer "Power Plane-No Net" (solid, pour order 20): 0,0 20.17,14.94 20.17,1245 2185,1245 2185,0 0,0
NetD2_1 on Top Layer "Power Plane-No Net" (solid, pour order 19): 2195,0 2195,1245 3075,1245 3075,0
NetD3_1 on Top Layer "Power Plane-No Net" (solid, pour order 17): 2195,1250 2195,2495 3075,2495 3075,1250
NetD4_1 on Top Layer "Power Plane-No Net" (solid, pour order 16): 2195,2500 2195,3745 3080,3745 3080,2500
NetD5_1 on Top Layer "Power Plane-No Net" (solid, pour order 15): 2195,3750 2195,5025 3075,5025 3075,3750
GND on Top Layer "Power Plane-No Net" (solid, remove dead copper, pour order 18): 3075,0 3215,0 6040,0 6040,65 6040,5025 5875,5025 3075,5025 3075,0
18.5VCC on Bottom Layer "Power Plane-No Net" (solid, pour order 28): 2940,30 2940,615 3760,615 3760,1255 2940,1255 2940,1865 3760,1865 3760,2505 2940,2505 2940,3115 3760,3115 3760,3755 2940,3755 2940,4365 3760,4365 3760,5000 3775,5015 6015,5015 6015,25
BAT_VOLT_SENSE0 on Bottom Layer "Power Plane-No Net" (solid, pour order 24): 2195,1245 2195,805 2940,805 2940,625 3750,625 3750,1245
BAT_VOLT_SENSE1 on Bottom Layer "Power Plane-No Net" (solid, pour order 23): 2195,2495 2195,2055 2940,2055 2940,1875 3750,1875 3750,2495
BAT_VOLT_SENSE2 on Bottom Layer "Power Plane-No Net" (solid, pour order 22): 2195,3745 2195,3305 2940,3305 2940,3125 3750,3125 3750,3745
TETH_VOLT_SENSE on Bottom Layer "Power Plane-No Net" (solid, pour order 21): 2195,4995 2195,4555 2940,4555 2940,4375 3750,4375 3750,4995
BAT_VOLT_SENSE2 on Power Plane (split plane): 3749.9,3125.1 3130,3125.1 3128.05,3124.71 3126.4,3123.6 3125.29,3121.95 3124.9,3120 3124.9,2505.1 2195.1,2505.1 2195.1,3744.9 3749.9,3744.9
VCC_3.3 on Power Plane (split plane): 5159.9,525.68 5159.9,477.11 5132.89,450.1 4487.11,450.1 4465.1,472.11 4465.1,532.89 4482.11,549.9 5135.68,549.9
TETH_VOLT_SENSE on Power Plane (split plane): 3749.9,4375.1 3130,4375.1 3128.05,4374.71 3126.4,4373.6 3125.29,4371.95 3124.9,4370 3124.9,3755.1 2195.1,3755.1 2195.1,4997.4 3749.9,4997.4
18.5VCC on Power Plane (split plane): 6009.9,37.6 3135.1,37.6 3135.1,614.9 3755,614.9 3756.95,615.29 3758.6,616.4 3759.71,618.05 3760.1,620 3760.1,1250 3759.71,1251.95 3758.6,1253.6 3756.95,1254.71 3755,1255.1 3135.1,1255.1 3135.1,1864.9 3755,1864.9 3756.95,1865.29 3758.6,1866.4 3759.71,1868.05 3760.1,1870 3760.1,2500 3759.71,2501.95 3758.6,2503.6 3756.95,2504.71 3755,2505.1 3135.1,2505.1 3135.1,3114.9 3755,3114.9 3756.95,3115.29 3758.6,3116.4 3759.71,3118.05 3760.1,3120 3760.1,3750 3759.71,3751.95 3758.6,3753.6 3756.95,3754.71 3755,3755.1 3135.1,3755.1 3135.1,4364.9 3755,4364.9 3756.95,4365.29 3758.6,4366.4 3759.71,4368.05 3760.1,4370 3760.1,4997.4 6009.9,4997.4
BAT_VOLT_SENSE0 on Power Plane (split plane): 3749.9,625.1 3130,625.1 3128.05,624.71 3126.4,623.6 3125.29,621.95 3124.9,620 3124.9,37.6 2195.1,37.6 2195.1,1244.9 3749.9,1244.9
"NetBattery Terminal 2_1" on Power Plane (split plane): 2184.9,2505.1 40.1,2505.1 40.1,3744.9 2184.9,3744.9
BAT_VOLT_SENSE1 on Power Plane (split plane): 3749.9,1875.1 3130,1875.1 3128.05,1874.71 3126.4,1873.6 3125.29,1871.95 3124.9,1870 3124.9,1255.1 2195.1,1255.1 2195.1,2494.9 3749.9,2494.9
NetFS4_1 on Power Plane (split plane): 2184.9,3755.1 40.1,3755.1 40.1,4997.4 2184.9,4997.4
"NetBattery Terminal 0_1" on Power Plane (split plane): 2184.9,37.6 40.1,37.6 40.1,1244.9 2184.9,1244.9
"NetBattery Terminal 1_1" on Power Plane (split plane): 2184.9,1255.1 40.1,1255.1 40.1,2494.9 2184.9,2494.9
GND on Ground Plane (split plane): 6009.9,37.6 40.1,37.6 40.1,4997.4 6009.9,4997.4

## Other copper
Power Plane (plane layer: these items are gaps in the copper):
  lines w10: 20,1250 2190,1250 3130,1250 ; 20,2500 2190,2500 3130,2500 ; 20,3750 2190,3750 3130,3750 ; 2190,17.4 2190,5012.4 ; 3130,25 3130,620 3755,620 3755,1250 3615,1250 3130,1250 ; 3755,5017.5 3755,4370 3130,4370 3130,3750 ; 5065,555 5137.79,555 ; 3130,1250 3130,1255 3130,1870 3755,1870 3755,2500 3130,2500 ; 3130,2500 3130,3120 3755,3120 3755,3750 3130,3750 ; 5137.79,555 5165,527.79 5165,475 5135,445 4485,445 4460,470 4460,535 4480,555 5137.79,555

## Silkscreen, mask and mechanical layers (free items; w line width, h text height)
Top Overlay:
  drawing of 24 lines, arcs and shapes, not listed
  text "Current Sensing" at 3250,4915 h75
  text "Tether Input" at 495,4825 h120
  text "G" at 5335,4600 h393.7 r90
  text "Battery Inputs" at 135,3585 h120
  text "Power Electronics" at 5065,3295 h75 r90
  text "Designed By" at 5170,3295 h75 r90
  text "Designed By" at 5540,3295 h75 r90
  text "Digital section & PCB" at 5435,3290 h75 r90
  text "Adam J. Vadala-Roth" at 5655,3290 h75 r90
  text "Breanna E. McElroy" at 5300,3285 h75 r90
  text "Filtering Section" at 4673.43,2140 h60 r90
  text "digital" at 4855,1425 h60 r90
  text "Sensor" at 4770,1420 h60 r90
  text "section" at 4930,1420 h60 r90
  text "Voltage" at 4585,940 h60 r90
  text "sensing" at 4665,940 h60 r90
  text "WAVE 18.5v Power" at 420,80 h120
  text "AUVSI RobSub 2013" at 2320,75 h100
  text "Sensor Section" at 4795,45 h60 r90
  text "Power Supply" at 4880,45 h60 r90
Mechanical 15:
  the board outline again, w5

## Text inside footprints (layer, text, board x,y; h text height)
"18.5V Rail": Top Overlay "GND" at 5390,2755 h60 r90; Top Overlay "18.5v" at 5390,2275 h60 r90
"ADC SPI": Top Overlay "6" at 5555,1435 h50 r270; Top Overlay "5" at 5455,1435 h50 r270; Top Overlay "2" at 5555,1795 h50 r270; Top Overlay "1" at 5455,1775 h50 r270
"Battery Terminal 0": Top Overlay "GND" at 230,800 h60; Top Overlay "18.5 V" at 945,800 h60
"Battery Terminal 1": Top Overlay "GND" at 235,2055 h60; Top Overlay "18.5 V" at 950,2050 h60
"Battery Terminal 2": Top Overlay "GND" at 235,3295 h60; Top Overlay "18.5 V" at 940,3300 h60
C1: Top Overlay "+" at 4714.29,2355.47 h59.06
C2: Top Overlay "+" at 4721.93,2730.47 h59.05
C3: Top Overlay "+" at 5001.93,2730.47 h59.05
C29: Top Overlay "+" at 5480,330 h59.06
C30: Top Overlay "+" at 5485,615 h59.06
C31: Top Overlay "+" at 5015,895 h59.06 r270
"Tether Terminal": Top Overlay "GND" at 240,4555 h60; Top Overlay "18.5 V" at 950,4545 h60